# Altium PCB FPGA_interface.PcbDoc
Units mil, origin at the board's own origin, x right, y up, seen from the top; angles counter-clockwise.
Board outline 4890 x 19568 mil, 4 copper layers (Top Layer, Ground Plane Top, Ground Plane Bottom, Bottom Layer); 14 components, 78 nets, 856 pads, 0 vias.
Unrouted connection lines stored in the file: 57.
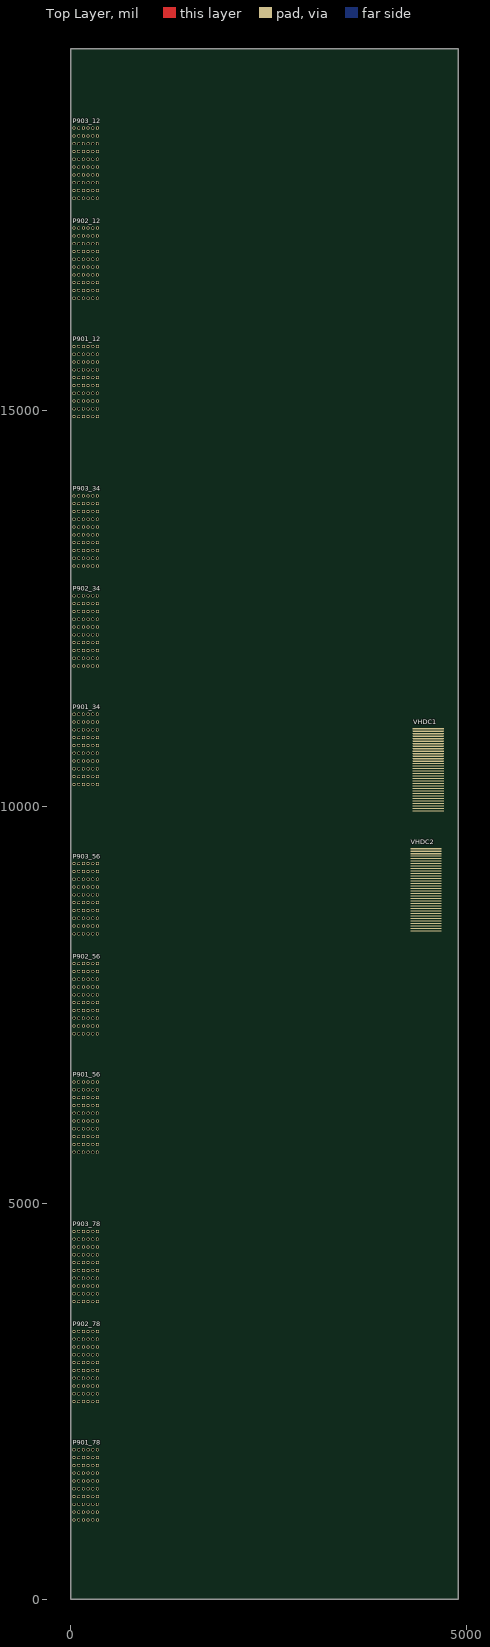
[diagram p0: Top Layer view]
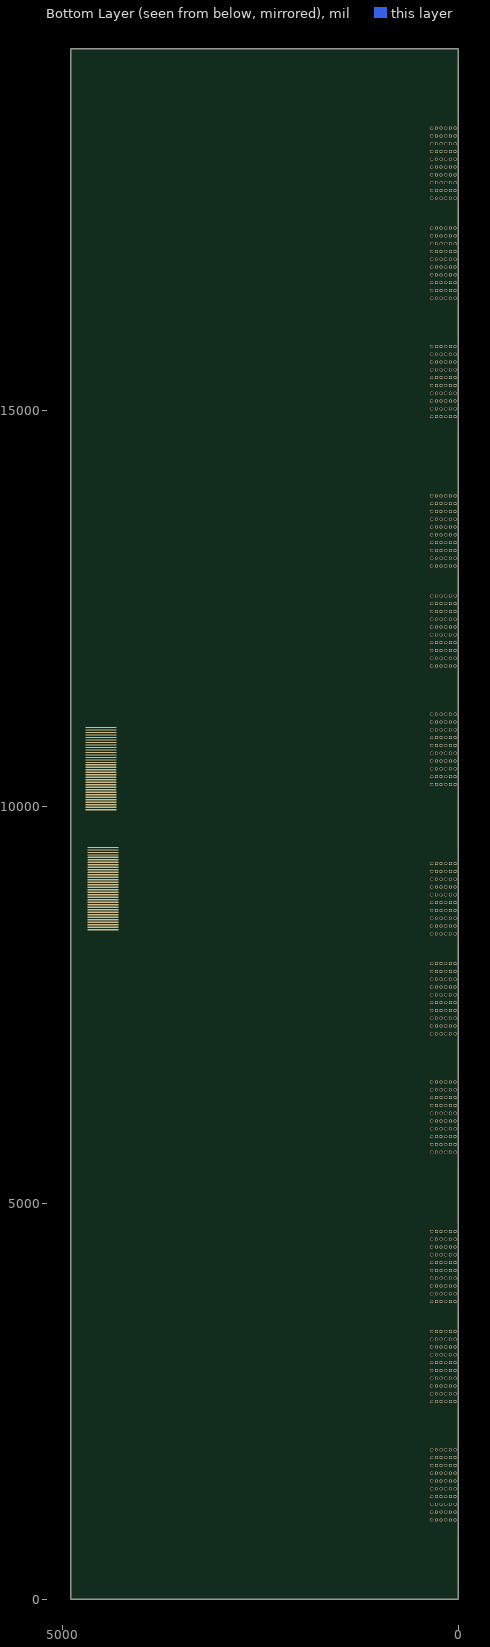
[diagram p1: Bottom Layer view, seen from below]
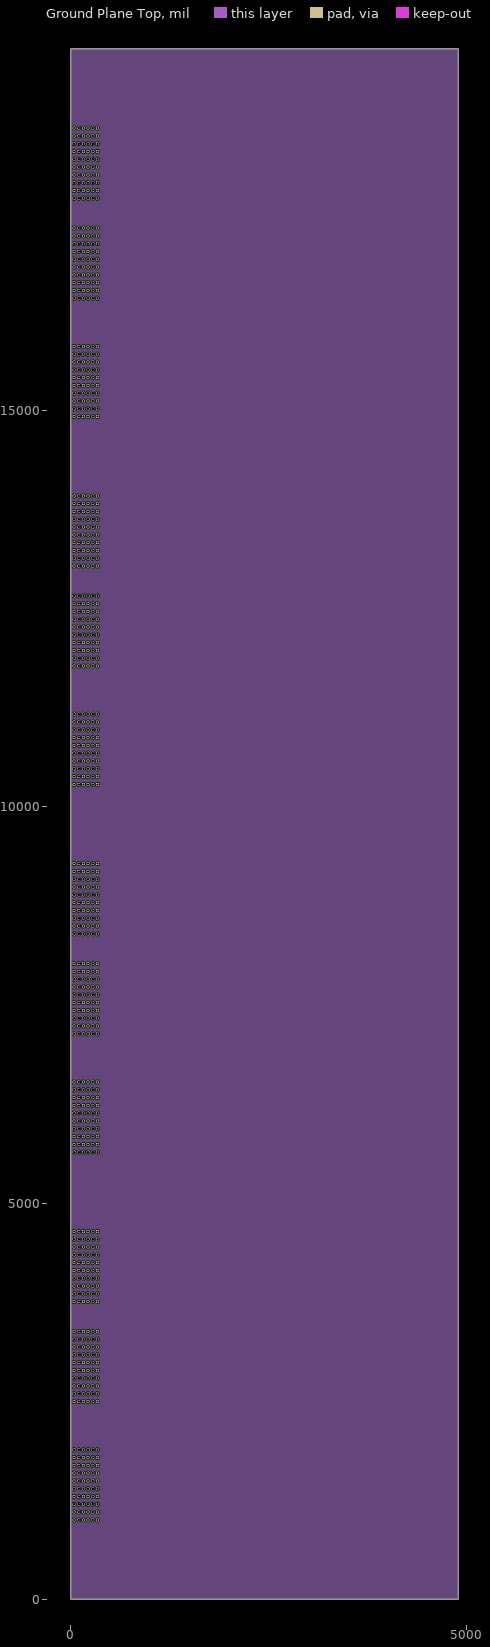
[diagram p2: Ground Plane Top]
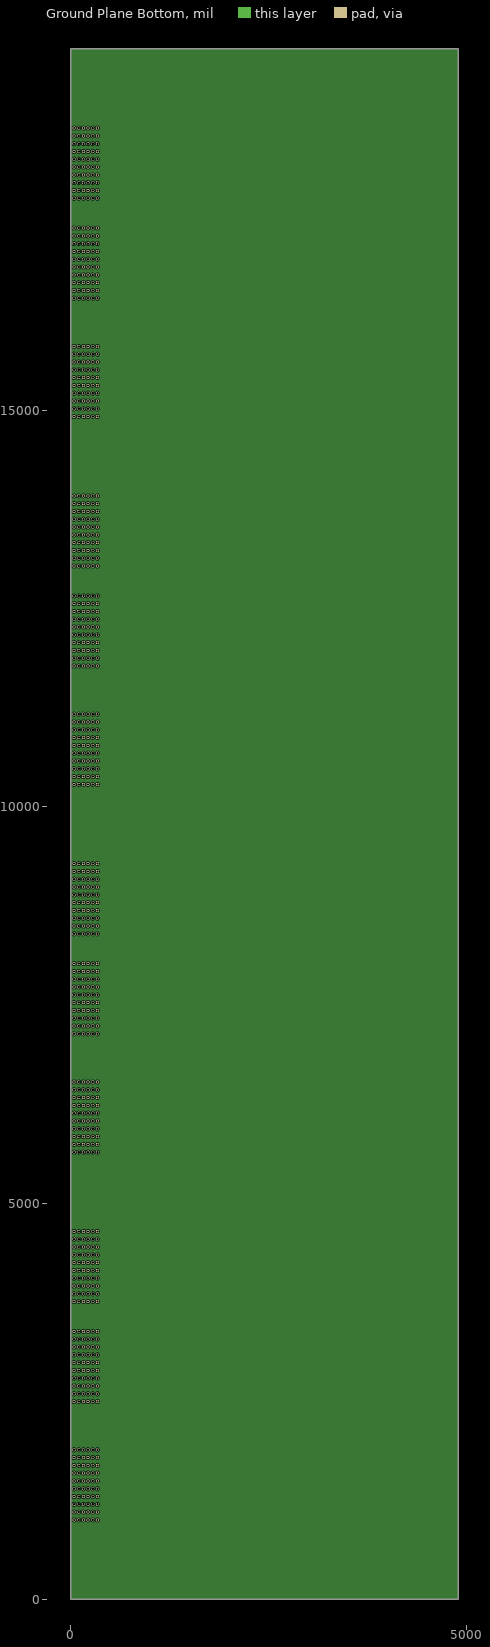
[diagram p3: Ground Plane Bottom]

## Layer stack, top to bottom
Top Layer: signal copper 1.4
Dielectric: core 12.6, FR-4, Dk 4.8
Ground Plane Top: signal copper 1.4
Dielectric: prepreg 12.6, FR-4, Dk 4.8
Ground Plane Bottom: signal copper 1.4
Dielectric: core 12.6, FR-4, Dk 4.8
Bottom Layer: signal copper 1.4

## Board outline
0,0 4890,0 4890,19568 0,19568

## Design rules (kind name [scope] priority, off if disabled: settings)
Clearance [All] p1: gap=10
PolygonConnect [All] p1: connectstyle=Relief reliefconductorwidth=10 reliefentries=4 polygonreliefangle="90 Angle"
RoomDefinition FPGA_interface [InComponentClass('FPGA_interface')] p1: confinementstyle=ConfineIn formatcopy=TRUE lockcomponents=FALSE outline 0,0 4890,0 4890,19568 0,19568
RoutingVias [All] p1: holewidth=28 width=50 viastyle="Through Hole" minholewidth=28 minwidth=50 maxholewidth=28 maxwidth=50
SilkscreenOverComponentPads [All] p1: minsilkscreentomaskgap=10
SolderMaskExpansion [All] p1: expansion=4
Width [All] p1: maxlimit=10 minlimit=10 preferedwidth=10
27 further rules are at their usual default settings.

## Classes and differential pairs
component class FPGA_interface: VHDC1 VHDC2
component class Ch1and2: P901_12 P902_12 P903_12
component class Ch3and4: P901_34 P902_34 P903_34
component class Ch5and6: P901_56 P902_56 P903_56
component class Ch7and8: P901_78 P902_78 P903_78

## Components (designator, comment, footprint, x,y, rotation, side; value= is the part's Value field where it differs from the comment)
P901_12 "P900_Header" P900_header 40,14926 r90 top
P901_34 "P900_Header" P900_header 40,10284 r90 top
P901_56 "P900_Header" P900_header 40,5642 r90 top
P901_78 "P900_Header" P900_header 40,1000 r90 top
P902_12 "P900_Header" P900_header 40,16420 r90 top
P902_34 "P900_Header" P900_header 40,11778 r90 top
P902_56 "P900_Header" P900_header 40,7136 r90 top
P902_78 "P900_Header" P900_header 40,2494 r90 top
P903_12 "P900_Header" P900_header 40,17682 r90 top
P903_34 "P900_Header" P900_header 40,13040 r90 top
P903_56 "P900_Header" P900_header 40,8398 r90 top
P903_78 "P900_Header" P900_header 40,3756 r90 top
VHDC1 "Component_1" "VHDCP-68-01-M-EM: PLUG" 4511,10987 r270 top
VHDC2 "Component_1" "VHDCP-68-01-M-EM: PLUG" 4483,9473 r270 top

## Footprints (in the part's own frame and the unit in brackets; to place one, negate y for a bottom-side part, rotate by r counter-clockwise, add the part's x,y. Pads: shape width x height; smd on the part's side, far side on the other; paste and mask are expansions set on the pad)
P900_header [mm]
  round 1 hole 0.7: A1(0,-7.5) A2(2.5,-7.5) A3(5,-7.5) A4(7.5,-7.5) A5(10,-7.5) A6(12.5,-7.5) A7(15,-7.5) A8(17.5,-7.5) A9(20,-7.5) A10(22.5,-7.5) B1(0,-6) B2(2.5,-6) B3(5,-6) B4(7.5,-6) B5(10,-6) B6(12.5,-6) B7(15,-6) B8(17.5,-6) B9(20,-6) B10(22.5,-6) BG1(0,-4.5) BG2(2.5,-4.5) BG3(5,-4.5) BG4(7.5,-4.5) BG5(10,-4.5) BG6(12.5,-4.5) BG7(15,-4.5) BG8(17.5,-4.5) BG9(20,-4.5) BG10(22.5,-4.5) C1(0,-3) C2(2.5,-3) C3(5,-3) C4(7.5,-3) C5(10,-3) C6(12.5,-3) C7(15,-3) C8(17.5,-3) C9(20,-3) C10(22.5,-3) D1(0,-1.5) D2(2.5,-1.5) D3(5,-1.5) D4(7.5,-1.5) D5(10,-1.5) D6(12.5,-1.5) D7(15,-1.5) D8(17.5,-1.5) D9(20,-1.5) D10(22.5,-1.5) DG1(0,0) DG2(2.5,0) DG3(5,0) DG4(7.5,0) DG5(10,0) DG6(12.5,0) DG7(15,0) DG8(17.5,0) DG9(20,0) DG10(22.5,0)
"VHDCP-68-01-M-EM: PLUG" [mm]
  rect 0.4x10 smd: A1(0,0) A10(7.2,0) A20(15.2,0) A30(23.2,0)
  oval 0.4x10 smd: A2(0.8,0) A3(1.6,0) A4(2.4,0) A5(3.2,0) A6(4,0) A7(4.8,0) A8(5.6,0) A9(6.4,0) A11(8,0) A12(8.8,0) A13(9.6,0) A14(10.4,0) A15(11.2,0) A16(12,0) A17(12.8,0) A18(13.6,0) A19(14.4,0) A21(16,0) A22(16.8,0) A23(17.6,0) A24(18.4,0) A25(19.2,0) A26(20,0) A27(20.8,0) A28(21.6,0) A29(22.4,0) A31(24,0) A32(24.8,0) A33(25.6,0) A34(26.4,0)
  rect 0.4x10 smd far side: B1(-0.4,0) B10(6.8,0) B20(14.8,0) B30(22.8,0)
  oval 0.4x10 smd far side: B2(0.4,0) B3(1.2,0) B4(2,0) B5(2.8,0) B6(3.6,0) B7(4.4,0) B8(5.2,0) B9(6,0) B11(7.6,0) B12(8.4,0) B13(9.2,0) B14(10,0) B15(10.8,0) B16(11.6,0) B17(12.4,0) B18(13.2,0) B19(14,0) B21(15.6,0) B22(16.4,0) B23(17.2,0) B24(18,0) B25(18.8,0) B26(19.6,0) B27(20.4,0) B28(21.2,0) B29(22,0) B31(23.6,0) B32(24.4,0) B33(25.2,0) B34(26,0)

## Part data
VHDC1 VHDC2: "VHDC_connector"

## Nets (pads, with @x,y where several pads share a name; then routed paths per layer and width w, separated by ;. In a path a pad name is that pad's centre, name@x,y a point inside that pad or via, vN(x,y) a via of type N, cw(c..) or ccw(c..) an arc to the next point about the centre after c; other vN are vias at no path point)
ADC12_A_RANGE: P903_12.C10
ADC12_B_RANGE: P902_12.C10
ADC12_CLK: P903_12.A10 VHDC1.A1
ADC12_D0: P903_12.C1 VHDC1.B1
ADC12_D1: P903_12.A2 VHDC1.A13
ADC12_D2: P903_12.C2 VHDC1.B3
ADC12_D3: P903_12.A3 VHDC1.A12
ADC12_D4: P903_12.C3 VHDC1.B4
ADC12_D5: P903_12.A4 VHDC1.A10
ADC12_D6: P903_12.C4 VHDC1.B6
ADC12_D7: P903_12.A5 VHDC1.A9
ADC12_D8: P903_12.C5 VHDC1.B7
ADC12_D9: P903_12.A6 VHDC1.A7
ADC12_D10: P903_12.C6 VHDC1.B9
ADC12_D11: P903_12.A7 VHDC1.A6
ADC12_D12: P903_12.C7 VHDC1.B10
ADC12_D13: P903_12.A8 VHDC1.A4
ADC12_D14: P903_12.C8 VHDC1.B12
ADC12_D15: P903_12.A9 VHDC1.A3
ADC12_RANGE: VHDC1.B13
ADC34_A_RANGE: P903_34.C10
ADC34_B_RANGE: P902_34.C10
ADC34_CLK: P903_34.A10
ADC34_D0: P903_34.C1
ADC34_D1: P903_34.A2
ADC34_D2: P903_34.C2
ADC34_D3: P903_34.A3
ADC34_D4: P903_34.C3
ADC34_D5: P903_34.A4
ADC34_D6: P903_34.C4
ADC34_D7: P903_34.A5
ADC34_D8: P903_34.C5
ADC34_D9: P903_34.A6
ADC34_D10: P903_34.C6
ADC34_D11: P903_34.A7
ADC34_D12: P903_34.C7
ADC34_D13: P903_34.A8
ADC34_D14: P903_34.C8
ADC34_D15: P903_34.A9
ADC56_A_RANGE: P903_56.C10
ADC56_B_RANGE: P902_56.C10
ADC56_CLK: P903_56.A10
ADC56_D0: P903_56.C1
ADC56_D1: P903_56.A2
ADC56_D2: P903_56.C2
ADC56_D3: P903_56.A3
ADC56_D4: P903_56.C3
ADC56_D5: P903_56.A4
ADC56_D6: P903_56.C4
ADC56_D7: P903_56.A5
ADC56_D8: P903_56.C5
ADC56_D9: P903_56.A6
ADC56_D10: P903_56.C6
ADC56_D11: P903_56.A7
ADC56_D12: P903_56.C7
ADC56_D13: P903_56.A8
ADC56_D14: P903_56.C8
ADC56_D15: P903_56.A9
ADC78_A_RANGE: P903_78.C10
ADC78_B_RANGE: P902_78.C10
ADC78_CLK: P903_78.A10
ADC78_D0: P903_78.C1
ADC78_D1: P903_78.A2
ADC78_D2: P903_78.C2
ADC78_D3: P903_78.A3
ADC78_D4: P903_78.C3
ADC78_D5: P903_78.A4
ADC78_D6: P903_78.C4
ADC78_D7: P903_78.A5
ADC78_D8: P903_78.C5
ADC78_D9: P903_78.A6
ADC78_D10: P903_78.C6
ADC78_D11: P903_78.A7
ADC78_D12: P903_78.C7
ADC78_D13: P903_78.A8
ADC78_D14: P903_78.C8
ADC78_D15: P903_78.A9
GND: P901_12.BG1 P901_12.BG2 P901_12.BG3 P901_12.BG4 P901_12.BG5 P901_12.BG6 P901_12.BG7 P901_12.BG8 P901_12.BG9 P901_12.BG10 P901_12.DG1 P901_12.DG2 P901_12.DG3 P901_12.DG4 P901_12.DG5 P901_12.DG6 P901_12.DG7 P901_12.DG8 P901_12.DG9 P901_12.DG10 P901_34.BG1 P901_34.BG2 P901_34.BG3 P901_34.BG4 P901_34.BG5 P901_34.BG6 P901_34.BG7 P901_34.BG8 P901_34.BG9 P901_34.BG10 P901_34.DG1 P901_34.DG2 P901_34.DG3 P901_34.DG4 P901_34.DG5 P901_34.DG6 P901_34.DG7 P901_34.DG8 P901_34.DG9 P901_34.DG10 P901_56.BG1 P901_56.BG2 P901_56.BG3 P901_56.BG4 P901_56.BG5 P901_56.BG6 P901_56.BG7 P901_56.BG8 P901_56.BG9 P901_56.BG10 P901_56.DG1 P901_56.DG2 P901_56.DG3 P901_56.DG4 P901_56.DG5 P901_56.DG6 P901_56.DG7 P901_56.DG8 P901_56.DG9 P901_56.DG10 P901_78.BG1 P901_78.BG2 P901_78.BG3 P901_78.BG4 P901_78.BG5 P901_78.BG6 P901_78.BG7 P901_78.BG8 P901_78.BG9 P901_78.BG10 P901_78.DG1 P901_78.DG2 P901_78.DG3 P901_78.DG4 P901_78.DG5 P901_78.DG6 P901_78.DG7 P901_78.DG8 P901_78.DG9 P901_78.DG10 P902_12.BG1 P902_12.BG2 P902_12.BG3 P902_12.BG4 P902_12.BG5 P902_12.BG6 P902_12.BG7 P902_12.BG8 P902_12.BG9 P902_12.BG10 P902_12.DG1 P902_12.DG2 P902_12.DG3 P902_12.DG4 P902_12.DG5 P902_12.DG6 P902_12.DG7 P902_12.DG8 P902_12.DG9 P902_12.DG10 P902_34.BG1 P902_34.BG2 P902_34.BG3 P902_34.BG4 P902_34.BG5 P902_34.BG6 P902_34.BG7 P902_34.BG8 P902_34.BG9 P902_34.BG10 P902_34.DG1 P902_34.DG2 P902_34.DG3 P902_34.DG4 P902_34.DG5 P902_34.DG6 P902_34.DG7 P902_34.DG8 P902_34.DG9 P902_34.DG10 P902_56.BG1 P902_56.BG2 P902_56.BG3 P902_56.BG4 P902_56.BG5 P902_56.BG6 P902_56.BG7 P902_56.BG8 P902_56.BG9 P902_56.BG10 P902_56.DG1 P902_56.DG2 P902_56.DG3 P902_56.DG4 P902_56.DG5 P902_56.DG6 P902_56.DG7 P902_56.DG8 P902_56.DG9 P902_56.DG10 P902_78.BG1 P902_78.BG2 P902_78.BG3 P902_78.BG4 P902_78.BG5 P902_78.BG6 P902_78.BG7 P902_78.BG8 P902_78.BG9 P902_78.BG10 P902_78.DG1 P902_78.DG2 P902_78.DG3 P902_78.DG4 P902_78.DG5 P902_78.DG6 P902_78.DG7 P902_78.DG8 P902_78.DG9 P902_78.DG10 P903_12.BG1 P903_12.BG2 P903_12.BG3 P903_12.BG4 P903_12.BG5 P903_12.BG6 P903_12.BG7 P903_12.BG8 P903_12.BG9 P903_12.BG10 P903_12.DG1 P903_12.DG2 P903_12.DG3 P903_12.DG4 P903_12.DG5 P903_12.DG6 P903_12.DG7 P903_12.DG8 P903_12.DG9 P903_12.DG10 P903_34.BG1 P903_34.BG2 P903_34.BG3 P903_34.BG4 P903_34.BG5 P903_34.BG6 P903_34.BG7 P903_34.BG8 P903_34.BG9 P903_34.BG10 P903_34.DG1 P903_34.DG2 P903_34.DG3 P903_34.DG4 P903_34.DG5 P903_34.DG6 P903_34.DG7 P903_34.DG8 P903_34.DG9 P903_34.DG10 P903_56.BG1 P903_56.BG2 P903_56.BG3 P903_56.BG4 P903_56.BG5 P903_56.BG6 P903_56.BG7 P903_56.BG8 P903_56.BG9 P903_56.BG10 P903_56.DG1 P903_56.DG2 P903_56.DG3 P903_56.DG4 P903_56.DG5 P903_56.DG6 P903_56.DG7 P903_56.DG8 P903_56.DG9 P903_56.DG10 P903_78.BG1 P903_78.BG2 P903_78.BG3 P903_78.BG4 P903_78.BG5 P903_78.BG6 P903_78.BG7 P903_78.BG8 P903_78.BG9 P903_78.BG10 P903_78.DG1 P903_78.DG2 P903_78.DG3 P903_78.DG4 P903_78.DG5 P903_78.DG6 P903_78.DG7 P903_78.DG8 P903_78.DG9 P903_78.DG10 VHDC1.A2 VHDC1.A5 VHDC1.A8 VHDC1.A11 VHDC1.A14 VHDC1.A21 VHDC1.A24 VHDC1.A27 VHDC1.A30 VHDC1.A33 VHDC1.B2 VHDC1.B5 VHDC1.B8 VHDC1.B11 VHDC1.B14 VHDC1.B21 VHDC1.B24 VHDC1.B27 VHDC1.B30 VHDC1.B33 VHDC2.A2 VHDC2.A5 VHDC2.A8 VHDC2.A11 VHDC2.A14 VHDC2.A21 VHDC2.A24 VHDC2.A27 VHDC2.A30 VHDC2.A33 VHDC2.B2 VHDC2.B5 VHDC2.B8 VHDC2.B11 VHDC2.B14 VHDC2.B21 VHDC2.B24 VHDC2.B27 VHDC2.B30 VHDC2.B33
pads on no net: P901_12.A1 P901_12.A2 P901_12.A3 P901_12.A4 P901_12.A5 P901_12.A6 P901_12.A7 P901_12.A8 P901_12.A9 P901_12.A10 P901_12.B1 P901_12.B2 P901_12.B3 P901_12.B4 P901_12.B5 P901_12.B6 P901_12.B7 P901_12.B8 P901_12.B9 P901_12.B10 P901_12.C1 P901_12.C2 P901_12.C3 P901_12.C4 P901_12.C5 P901_12.C6 P901_12.C7 P901_12.C8 P901_12.C9 P901_12.C10 P901_12.D1 P901_12.D2 P901_12.D3 P901_12.D4 P901_12.D5 P901_12.D6 P901_12.D7 P901_12.D8 P901_12.D9 P901_12.D10 P901_34.A1 P901_34.A2 P901_34.A3 P901_34.A4 P901_34.A5 P901_34.A6 P901_34.A7 P901_34.A8 P901_34.A9 P901_34.A10 P901_34.B1 P901_34.B2 P901_34.B3 P901_34.B4 P901_34.B5 P901_34.B6 P901_34.B7 P901_34.B8 P901_34.B9 P901_34.B10 P901_34.C1 P901_34.C2 P901_34.C3 P901_34.C4 P901_34.C5 P901_34.C6 P901_34.C7 P901_34.C8 P901_34.C9 P901_34.C10 P901_34.D1 P901_34.D2 P901_34.D3 P901_34.D4 P901_34.D5 P901_34.D6 P901_34.D7 P901_34.D8 P901_34.D9 P901_34.D10 P901_56.A1 P901_56.A2 P901_56.A3 P901_56.A4 P901_56.A5 P901_56.A6 P901_56.A7 P901_56.A8 P901_56.A9 P901_56.A10 P901_56.B1 P901_56.B2 P901_56.B3 P901_56.B4 P901_56.B5 P901_56.B6 P901_56.B7 P901_56.B8 P901_56.B9 P901_56.B10 P901_56.C1 P901_56.C2 P901_56.C3 P901_56.C4 P901_56.C5 P901_56.C6 P901_56.C7 P901_56.C8 P901_56.C9 P901_56.C10 P901_56.D1 P901_56.D2 P901_56.D3 P901_56.D4 P901_56.D5 P901_56.D6 P901_56.D7 P901_56.D8 P901_56.D9 P901_56.D10 P901_78.A1 P901_78.A2 P901_78.A3 P901_78.A4 P901_78.A5 P901_78.A6 P901_78.A7 P901_78.A8 P901_78.A9 P901_78.A10 P901_78.B1 P901_78.B2 P901_78.B3 P901_78.B4 P901_78.B5 P901_78.B6 P901_78.B7 P901_78.B8 P901_78.B9 P901_78.B10 P901_78.C1 P901_78.C2 P901_78.C3 P901_78.C4 P901_78.C5 P901_78.C6 P901_78.C7 P901_78.C8 P901_78.C9 P901_78.C10 P901_78.D1 P901_78.D2 P901_78.D3 P901_78.D4 P901_78.D5 P901_78.D6 P901_78.D7 P901_78.D8 P901_78.D9 P901_78.D10 P902_12.A1 P902_12.A2 P902_12.A3 P902_12.A4 P902_12.A5 P902_12.A6 P902_12.A7 P902_12.A8 P902_12.A9 P902_12.A10 P902_12.B1 P902_12.B2 P902_12.B3 P902_12.B4 P902_12.B5 P902_12.B6 P902_12.B7 P902_12.B8 P902_12.B9 P902_12.B10 P902_12.C1 P902_12.C2 P902_12.C3 P902_12.C4 P902_12.C5 P902_12.C6 P902_12.C7 P902_12.C8 P902_12.C9 P902_12.D1 P902_12.D2 P902_12.D3 P902_12.D4 P902_12.D5 P902_12.D6 P902_12.D7 P902_12.D8 P902_12.D9 P902_12.D10 P902_34.A1 P902_34.A2 P902_34.A3 P902_34.A4 P902_34.A5 P902_34.A6 P902_34.A7 P902_34.A8 P902_34.A9 P902_34.A10 P902_34.B1 P902_34.B2 P902_34.B3 P902_34.B4 P902_34.B5 P902_34.B6 P902_34.B7 P902_34.B8 P902_34.B9 P902_34.B10 P902_34.C1 P902_34.C2 P902_34.C3 P902_34.C4 P902_34.C5 P902_34.C6 P902_34.C7 P902_34.C8 P902_34.C9 P902_34.D1 P902_34.D2 P902_34.D3 P902_34.D4 P902_34.D5 P902_34.D6 P902_34.D7 P902_34.D8 P902_34.D9 P902_34.D10 P902_56.A1 P902_56.A2 P902_56.A3 P902_56.A4 P902_56.A5 P902_56.A6 P902_56.A7 P902_56.A8 P902_56.A9 P902_56.A10 P902_56.B1 P902_56.B2 P902_56.B3 P902_56.B4 P902_56.B5 P902_56.B6 P902_56.B7 P902_56.B8 P902_56.B9 P902_56.B10 P902_56.C1 P902_56.C2 P902_56.C3 P902_56.C4 P902_56.C5 P902_56.C6 P902_56.C7 P902_56.C8 P902_56.C9 P902_56.D1 P902_56.D2 P902_56.D3 P902_56.D4 P902_56.D5 P902_56.D6 P902_56.D7 P902_56.D8 P902_56.D9 P902_56.D10 P902_78.A1 P902_78.A2 P902_78.A3 P902_78.A4 P902_78.A5 P902_78.A6 P902_78.A7 P902_78.A8 P902_78.A9 P902_78.A10 P902_78.B1 P902_78.B2 P902_78.B3 P902_78.B4 P902_78.B5 P902_78.B6 P902_78.B7 P902_78.B8 P902_78.B9 P902_78.B10 P902_78.C1 P902_78.C2 P902_78.C3 P902_78.C4 P902_78.C5 P902_78.C6 P902_78.C7 P902_78.C8 P902_78.C9 P902_78.D1 P902_78.D2 P902_78.D3 P902_78.D4 P902_78.D5 P902_78.D6 P902_78.D7 P902_78.D8 P902_78.D9 P902_78.D10 P903_12.A1 P903_12.B1 P903_12.B2 P903_12.B3 P903_12.B4 P903_12.B5 P903_12.B6 P903_12.B7 P903_12.B8 P903_12.B9 P903_12.B10 P903_12.C9 P903_12.D1 P903_12.D2 P903_12.D3 P903_12.D4 P903_12.D5 P903_12.D6 P903_12.D7 P903_12.D8 P903_12.D9 P903_12.D10 P903_34.A1 P903_34.B1 P903_34.B2 P903_34.B3 P903_34.B4 P903_34.B5 P903_34.B6 P903_34.B7 P903_34.B8 P903_34.B9 P903_34.B10 P903_34.C9 P903_34.D1 P903_34.D2 P903_34.D3 P903_34.D4 P903_34.D5 P903_34.D6 P903_34.D7 P903_34.D8 P903_34.D9 P903_34.D10 P903_56.A1 P903_56.B1 P903_56.B2 P903_56.B3 P903_56.B4 P903_56.B5 P903_56.B6 P903_56.B7 P903_56.B8 P903_56.B9 P903_56.B10 P903_56.C9 P903_56.D1 P903_56.D2 P903_56.D3 P903_56.D4 P903_56.D5 P903_56.D6 P903_56.D7 P903_56.D8 P903_56.D9 P903_56.D10 P903_78.A1 P903_78.B1 P903_78.B2 P903_78.B3 P903_78.B4 P903_78.B5 P903_78.B6 P903_78.B7 P903_78.B8 P903_78.B9 P903_78.B10 P903_78.C9 P903_78.D1 P903_78.D2 P903_78.D3 P903_78.D4 P903_78.D5 P903_78.D6 P903_78.D7 P903_78.D8 P903_78.D9 P903_78.D10 VHDC1.A15 VHDC1.A16 VHDC1.A17 VHDC1.A18 VHDC1.A19 VHDC1.A20 VHDC1.A22 VHDC1.A23 VHDC1.A25 VHDC1.A26 VHDC1.A28 VHDC1.A29 VHDC1.A31 VHDC1.A32 VHDC1.A34 VHDC1.B15 VHDC1.B16 VHDC1.B17 VHDC1.B18 VHDC1.B19 VHDC1.B20 VHDC1.B22 VHDC1.B23 VHDC1.B25 VHDC1.B26 VHDC1.B28 VHDC1.B29 VHDC1.B31 VHDC1.B32 VHDC1.B34 VHDC2.A1 VHDC2.A3 VHDC2.A4 VHDC2.A6 VHDC2.A7 VHDC2.A9 VHDC2.A10 VHDC2.A12 VHDC2.A13 VHDC2.A15 VHDC2.A16 VHDC2.A17 VHDC2.A18 VHDC2.A19 VHDC2.A20 VHDC2.A22 VHDC2.A23 VHDC2.A25 VHDC2.A26 VHDC2.A28 VHDC2.A29 VHDC2.A31 VHDC2.A32 VHDC2.A34 VHDC2.B1 VHDC2.B3 VHDC2.B4 VHDC2.B6 VHDC2.B7 VHDC2.B9 VHDC2.B10 VHDC2.B12 VHDC2.B13 VHDC2.B15 VHDC2.B16 VHDC2.B17 VHDC2.B18 VHDC2.B19 VHDC2.B20 VHDC2.B22 VHDC2.B23 VHDC2.B25 VHDC2.B26 VHDC2.B28 VHDC2.B29 VHDC2.B31 VHDC2.B32 VHDC2.B34

## Polygon pours and split planes (outlines as drawn)
GND on Ground Plane Top "Ground Plane Top-No Net" (solid, remove dead copper, pour order 2): 0,19568 4890,19568 4890,0 0,0
GND on Ground Plane Bottom "Ground Plane Bot-GND" (solid, remove dead copper, pour order 4): 0,19568 4890,19568 4890,0 0,0